# Altium PCB 电眼主板.PcbDoc (part 2 of 3)
Units mm, origin at the board's own origin, x right, y up, seen from the top; angles counter-clockwise.
Board outline 180 x 100 mm, 2 copper layers (Top Layer, Bottom Layer); 220 components, 270 nets, 826 pads, 211 vias.
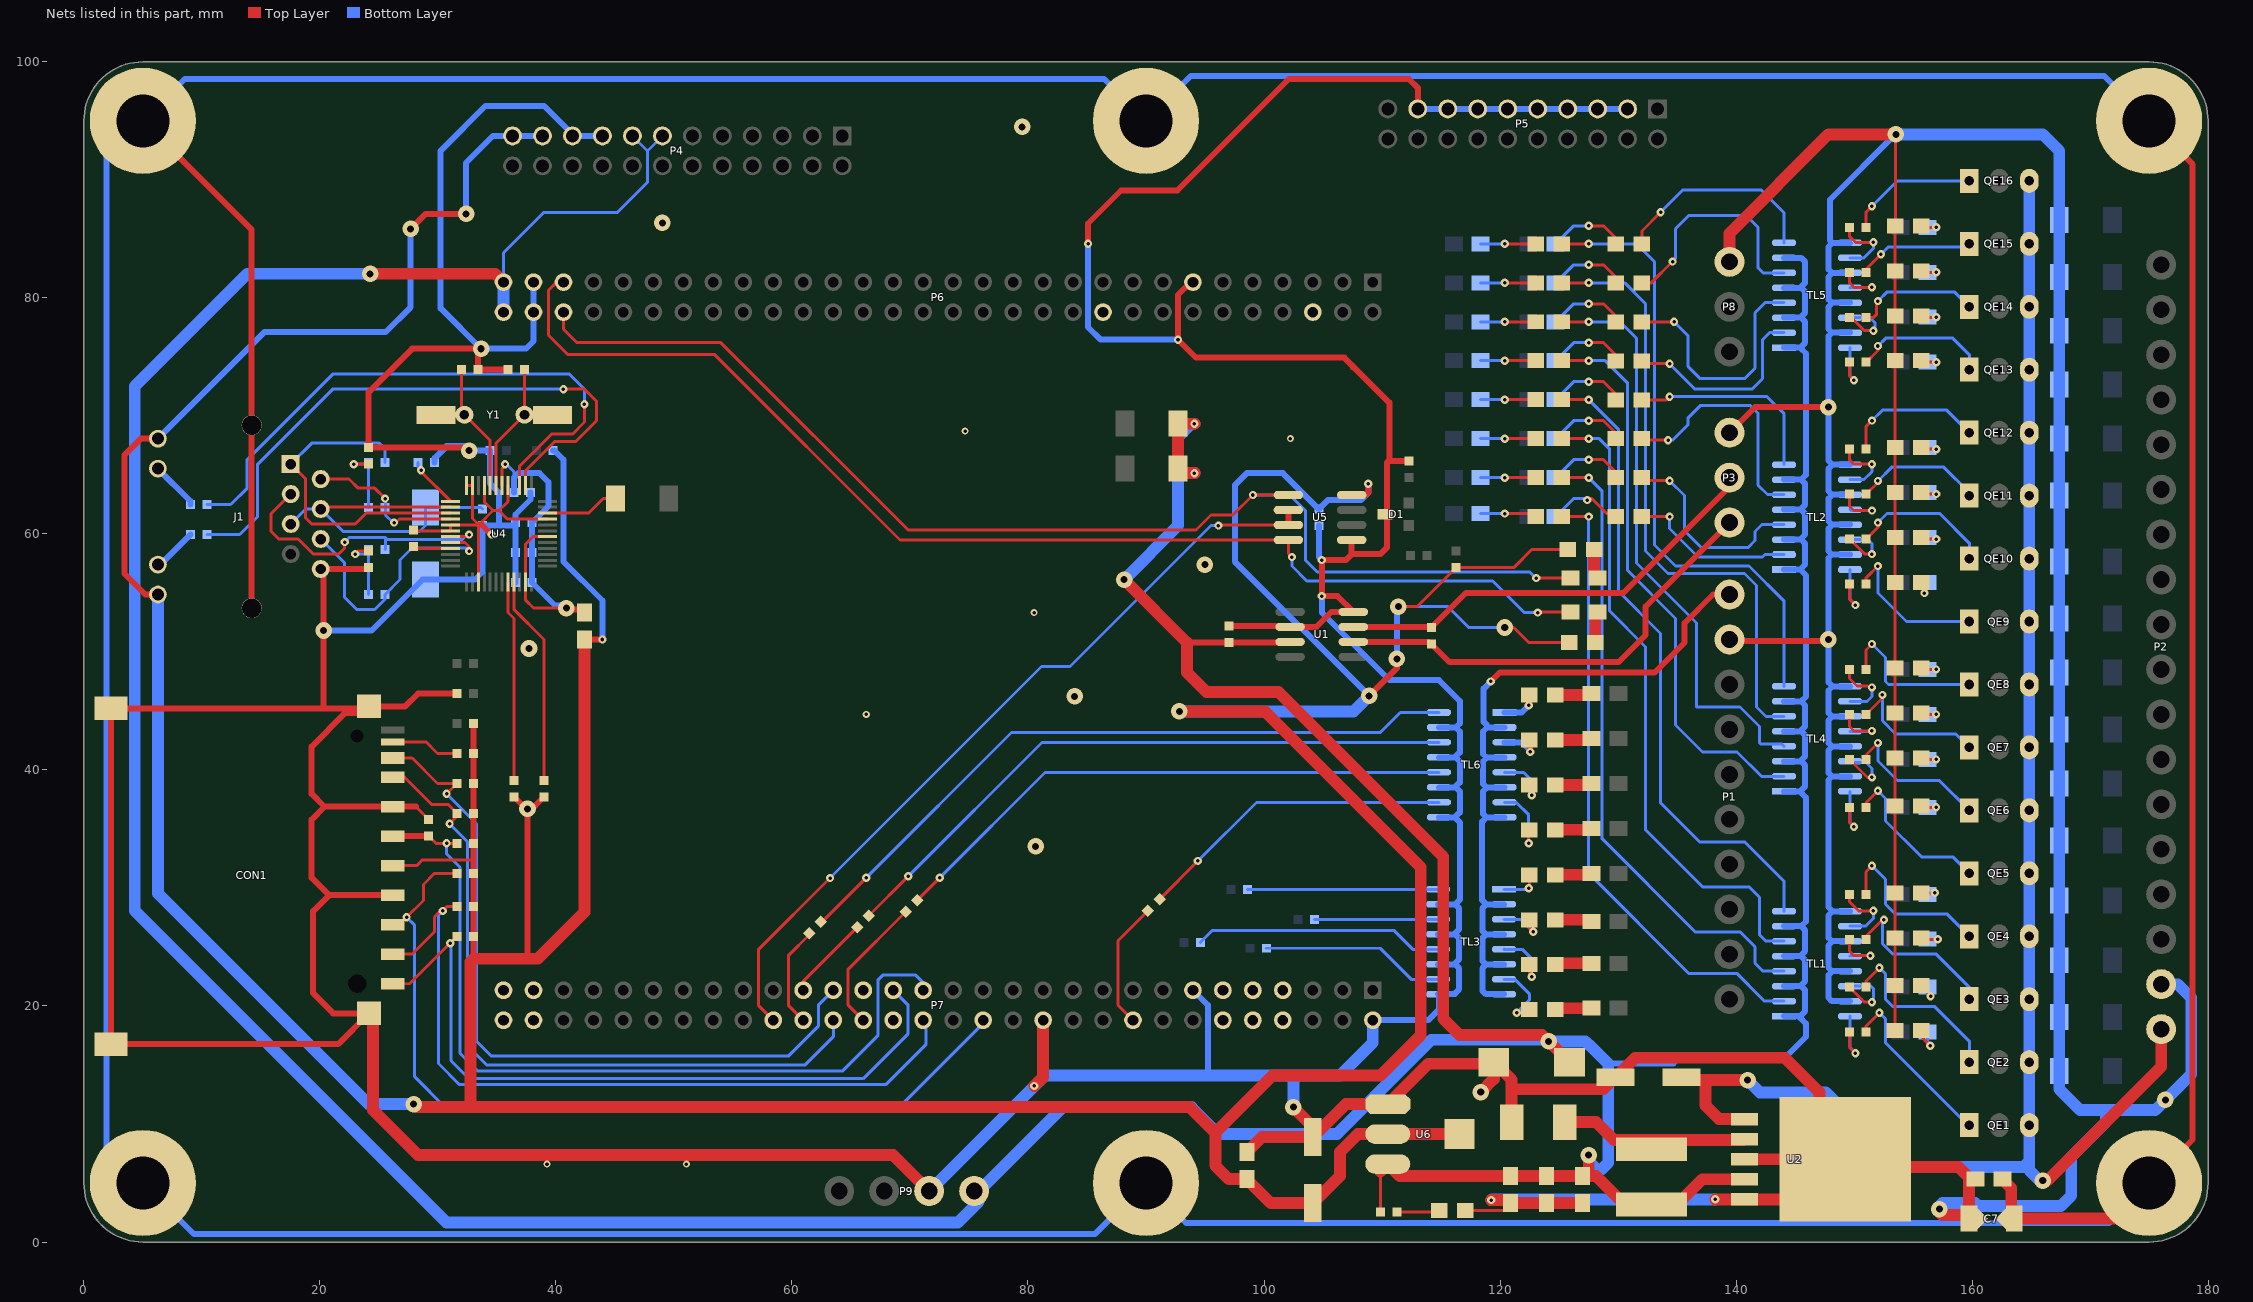
[diagram p2: the nets of this part, all layers, seen from the top]

## Via types
v1: diameter 0.7, hole 0.3, Top Layer to Bottom Layer, 166 vias
v2: diameter 1.4, hole 0.6, Top Layer to Bottom Layer, 39 vias
v3: diameter 0.6, hole 0.3, Top Layer to Bottom Layer, 6 vias

## Nets (pads, with @x,y where several pads share a name; then routed paths per layer and width w, separated by ;. In a path a pad name is that pad's centre, name@x,y a point inside that pad or via, vN(x,y) a via of type N, cw(c..) or ccw(c..) an arc to the next point about the centre after c; other vN are vias at no path point) (continued)
GND: C1.2 C2.1 C3.1 C4.1 C5.2 C6.2 C7.2 C8.2 C9.1 C10.1 C11.1 C12.2 C13.1 C14.1 C15.1 C16.1 C17.2 C18.2 C19.1 C20.1 CON1.3 CON1.6 CON1.12 CON1.13 CON1.14 CON1.15 CT1.2 CT2.2 D1.3 D2.2 DE1.1 DE2.1 DE3.1 DE4.1 DE5.1 DE6.1 DE7.1 DE8.1 DE9.1 DE10.1 DE11.1 DE12.1 DE13.1 DE14.1 DE15.1 DE16.1 J1.8 LED1.2 LED2.2 LED3.2 LED4.2 LED17.2 LED18.2 LED19.2 LED20.2 LED33.2 LED34.2 LED35.2 LED36.2 LED37.2 LED38.2 LED39.2 LED40.2 P1.9 P2.17 P3.3 P4.17 P4.19 P5.3 P5.5 P5.7 P5.9 P5.11 P5.13 P5.15 P5.17 P6.13 P6.57 P6.58 P7.2 P7.13 P7.24 P8.3 P9.3 R26.2 R33.2 R35.1 R38.2 R39.1 TL1.9 TL1.11 TL1.13 TL1.15 TL2.9 TL2.11 TL2.13 TL2.15 TL3.9 TL3.11 TL3.13 TL3.15 TL4.9 TL4.11 TL4.13 TL4.15 TL5.9 TL5.11 TL5.13 TL5.15 TL6.9 TL6.11 TL6.13 TL6.15 U1.2 U1.8 U2.3 U2.5 U2.6 U4.5 U4.6 U4.15 U4.33 U4.41 U4.45 U4.47 U4.48 U5.5 U6.1 V1.1 | length 1116.1
  Top Layer w0.254: C8.2@27.997,60.268 U4.6@31.083,60.268 U4.5@31.083,60.768 33.433,60.768 ; 28.14,36.884 C2.1@29.21,35.814 ; U4.48@32.433,64.118 U4.47@32.933,64.118 32.933,61.298 33.433,60.798 33.433,60.768 ; v2@32.433,66.85 v2(32.639,67.056) 32.766,66.929 v2@33.274,66.929 ; U4.15@33.433,55.918 33.433,60.768 ; U4.45@33.933,64.118 33.933,62.714 34.671,61.976 ; U4.41@35.933,64.118 35.933,62.73 35.179,61.976 ; U4.33@39.283,61.268 35.887,61.268 35.179,61.976 ; D2.2@117.043,2.667 120.269,2.667 C10.1@120.904,3.302 ; P8.3@139.446,83.058 P8.3@139.446,83.185 ; LED1.2@153.467,17.907 LED2.2@153.467,21.717 LED3.2@153.467,25.781 LED4.2@153.467,29.591 LED17.2@153.467,36.957 LED18.2@153.467,41.021 LED19.2@153.467,44.831 LED20.2@153.467,48.641 153.467,63.5 153.467,74.676 153.467,86.081 LED40.2@153.492,86.106 153.492,93.802 v2(153.543,93.853) ; 33.433,60.768 33.463,60.768 33.493,60.798 34.671,61.976 ; 34.671,61.976 35.179,61.976
  Top Layer w0.508: CON1.14@2.458,45.384 CON1.14@2.286,45.212 ; CON1.13@23.876,44.831 22.164,44.831 19.304,41.971 19.304,37.973 20.393,36.884 ; C20.1@24.13,57.15 24.008,57.028 J1.8@20.066,57.028 20.32,56.774 v2(20.32,51.816) 20.32,45.212 ; CON1.13@24.162,45.212 20.32,45.212 ; CON1.13@24.162,45.384 27.223,45.384 28.321,46.482 R26.2@31.623,46.482 ; CON1.3@26.162,29.384 20.781,29.384 ; 28.14,36.884 CON1.6@26.162,36.884 20.393,36.884 ; v2(32.639,67.056) 32.385,67.31 C19.1@24.13,67.31 24.13,72.009 27.813,75.692 v2(33.655,75.692) 33.401,75.438 C18.2@33.401,73.914 C17.2@35.941,73.914 ; 33.433,60.798 33.493,60.798 33.69,60.798 v1(34.544,59.944) ; v1(85.09,84.582) 85.09,86.306 87.884,89.1 92.656,89.1 102.108,98.552 112.268,98.552 113.03,97.79 P5.17@113.03,96.012 ; P6.13@93.98,81.336 93.782,81.336 92.71,80.264 v1(92.71,76.454) 94.234,74.93 106.807,74.93 107.521,74.216 ; C1.2@97.028,52.197 102.135,52.197 U1.2@102.211,52.121 104.445,52.121 105.715,53.391 U1.8@107.568,53.391 ; 105.537,57.785 v1(104.902,57.785) ; U5.5@107.428,59.487 107.428,58.293 ; 107.521,74.12 107.521,74.216 ; U1.8@108.128,53.391 U1.8@107.568,53.391 ; 110.405,64.571 110.405,65.405 ; R38.2@112.268,66.167 110.532,66.167 ; P1.9@139.446,50.292 140.081,50.927 147.701,50.927 v2(147.828,51.054) ; P3.3@139.446,68.58 141.605,70.739 v2(147.828,70.739) ; CON1.14@2.286,45.212 20.32,45.212 ; CON1.14@2.286,45.212 CON1.15@2.286,16.764 21.542,16.764 CON1.12@24.162,19.384 21.129,19.384 19.431,21.082 19.431,28.034 20.781,29.384 ; 20.393,36.884 19.304,35.795 19.304,30.861 20.781,29.384 ; v1(104.902,57.785) 106.934,57.785 107.428,58.279 107.428,58.293 ; v1(104.902,57.785) v1(104.902,54.737) 106.222,54.737 U1.8@107.568,53.391 ; 107.428,58.293 109.855,58.293 110.405,58.843 110.405,65.405 ; 107.521,74.216 110.617,71.12 110.617,66.252 110.532,66.167 ; 110.405,65.405 110.405,66.04 110.532,66.167
  Top Layer w1: CON1.12@24.162,19.384 24.511,19.035 24.511,11.176 28.321,7.366 68.58,7.366 P9.3@71.628,4.318 ; v1(80.535,13.225) 81.28,13.97 P7.24@81.28,18.796 ; C11.1@98.552,7.62 99.828,8.896 C12.2@104.14,8.896 ; v2(102.489,11.43) 104.14,9.779 C12.2@104.14,8.896 ; v2(118.364,12.7) 119.482,13.818 CT1.2@119.482,15.24 ; v1(119.253,3.556) 120.65,3.556 C10.1@120.904,3.302 C6.2@123.952,3.302 C4.1@127,3.302 ; V1.1@120.98,10.16 120.98,12.941 ; v1(138.234,3.614) U2.5@140.716,3.614 145.85,3.614 U2.6@149.25,7.014 ; P1.9@139.444,50.29 P1.9@139.446,50.292 ; P8.3@139.446,83.058 139.446,85.471 147.828,93.853 v2(153.543,93.853) ; U2.3@140.716,7.014 U2.6@149.25,7.014 ; U2.6@153.978,2.286 U2.6@149.25,7.014 ; v2(157.226,2.794) 157.226,2.54 157.48,2.286 159.436,2.286 C7.2@159.741,1.981 ; C7.2@160.35,1.981 C7.2@159.741,1.981 ; C12.2@104.14,8.896 106.927,11.683 U6.1@110.488,11.683 113.918,15.113 119.355,15.113 CT1.2@119.482,15.24 ; CT1.2@119.482,15.24 120.98,13.741 120.98,12.941 ; 120.98,12.941 128.759,12.941 C5.2@129.788,13.97 131.439,15.621 133.223,15.621 133.731,15.621 144.145,15.621 147.066,12.7 147.066,9.198 U2.6@149.25,7.014 ; U2.6@149.25,7.014 149.914,6.35 158.852,6.35 159.741,5.461 C7.2@159.741,1.981
  Bottom Layer w0.254: C14.1@36.322,60.706 C14.1@36.576,60.96 ; 104.648,58.039 v1(104.902,57.785)
  Bottom Layer w0.508: v2(20.32,51.816) 24.384,51.816 28.702,56.134 CT2.2@28.956,56.134 33.147,56.134 33.782,56.769 C9.1@33.782,60.706 ; R35.1@29.718,66.04 29.718,66.421 30.734,67.437 32.258,67.437 v2(32.639,67.056) R33.2@34.417,67.056 34.424,67.049 34.424,64.255 35.179,63.5 35.179,60.833 35.306,60.706 ; v1(34.544,59.944) C9.1@33.782,60.706 ; C14.1@36.322,60.706 35.306,60.706 ; C16.1@36.576,55.88 C13.1@36.576,58.42 C14.1@36.576,60.96 36.576,61.648 37.846,62.918 C15.1@37.846,63.5 ; P6.57@38.1,81.336 P6.58@38.1,78.796 38.1,76.327 37.465,75.692 v2(33.655,75.692) 30.226,79.121 30.226,92.456 30.407,92.637 34.036,96.266 38.989,96.266 41.402,93.853 P4.19@41.402,93.726 P4.17@43.942,93.726 ; v1(85.09,84.582) 85.09,77.526 86.162,76.454 v1(92.71,76.454) ; P7.13@93.98,21.336 95.25,20.066 95.25,14.097 ; 104.648,58.039 C3.1@104.648,60.706 ; v1(104.902,54.737) 104.902,53.34 110.617,47.625 114.808,47.625 116.586,45.847 116.586,43.939 116.248,43.601 ; P7.2@109.22,18.796 113.919,18.796 114.808,19.685 114.808,20.936 TL3.9@114.749,20.995 116.106,20.995 ; P5.17@113.03,96.012 P5.15@115.57,96.012 P5.13@118.11,96.012 P5.3@130.81,96.012 ; TL3.11@114.749,23.535 116.106,23.535 ; TL3.13@114.749,26.075 116.106,26.075 ; TL3.15@114.749,28.615 116.189,28.615 ; TL6.9@114.808,35.981 116.165,35.981 ; TL6.11@114.808,38.521 116.165,38.521 ; TL6.13@114.808,41.061 116.165,41.061 ; TL6.15@114.808,43.601 116.248,43.601 ; 116.189,20.995 116.106,20.995 ; 116.248,35.981 116.165,35.981 ; TL1.15@149.665,20.407 148.122,20.407 147.828,20.701 147.828,22.606 148.169,22.947 ; TL1.13@149.665,22.947 148.169,22.947 ; TL1.11@149.665,25.487 148.169,25.487 ; TL1.9@149.665,28.027 148.169,28.027 ; TL4.15@149.665,39.457 148.122,39.457 ; TL4.13@149.665,41.997 148.169,41.997 ; TL4.11@149.665,44.537 148.169,44.537 ; TL4.9@149.665,47.077 148.169,47.077 ; TL2.15@149.665,58.253 148.122,58.253 ; TL2.13@149.665,60.793 148.169,60.793 ; TL2.11@149.665,63.333 148.169,63.333 ; TL2.9@149.665,65.873 148.169,65.873 ; TL5.15@149.665,77.049 148.122,77.049 ; TL5.13@149.665,79.589 148.169,79.589 ; TL5.11@149.665,82.129 148.169,82.129 ; TL5.9@149.665,84.669 148.169,84.669 ; v2@153.492,93.853 147.955,88.316 147.955,84.883 148.169,84.669 ; C9.1@33.782,60.706 35.306,60.706 ; 116.106,20.995 116.53,21.419 116.53,23.194 116.189,23.535 116.106,23.535 ; 116.106,23.535 116.53,23.959 116.53,25.734 116.189,26.075 116.106,26.075 ; 116.106,26.075 116.53,26.499 116.53,28.274 116.189,28.615 ; 116.165,35.981 116.589,36.405 116.589,38.18 116.248,38.521 116.165,38.521 ; 116.165,35.981 116.586,35.56 116.586,29.012 116.189,28.615 ; 116.165,38.521 116.589,38.945 116.589,40.72 116.248,41.061 116.165,41.061 ; 116.165,41.061 116.589,41.485 116.589,43.26 116.248,43.601 ; 148.122,39.457 147.828,39.751 147.828,41.656 148.169,41.997 ; 148.122,39.457 147.828,39.163 147.828,28.368 148.169,28.027 ; 148.122,58.253 147.828,58.547 147.828,60.452 148.169,60.793 ; 148.122,58.253 147.828,57.959 v2(147.828,51.054) 147.828,47.418 148.169,47.077 ; 148.122,77.049 147.828,77.343 147.828,79.248 148.169,79.589 ; 148.122,77.049 147.828,76.755 v2(147.828,70.739) 147.828,66.214 148.169,65.873 ; 148.169,22.947 148.122,22.947 147.828,23.241 147.828,25.146 148.169,25.487 ; 148.169,25.487 148.122,25.487 147.828,25.781 147.828,27.686 148.169,28.027 ; 148.169,41.997 148.122,41.997 147.828,42.291 147.828,44.196 148.169,44.537 ; 148.169,44.537 148.122,44.537 147.828,44.831 147.828,46.736 148.169,47.077 ; 148.169,60.793 148.122,60.793 147.828,61.087 147.828,62.992 148.169,63.333 ; 148.169,63.333 148.122,63.333 147.828,63.627 147.828,65.532 148.169,65.873 ; 148.169,79.589 148.122,79.589 147.828,79.883 147.828,81.788 148.169,82.129 ; 148.169,82.129 148.122,82.129 147.828,82.423 147.828,84.328 148.169,84.669
  Bottom Layer w1: P9.3@71.628,4.318 81.407,14.097 95.25,14.097 102.489,14.097 ; v2(102.489,11.43) 102.489,14.097 ; P7.2@109.22,18.796 109.22,16.891 106.426,14.097 102.489,14.097 ; v1(119.253,3.556) 119.311,3.614 130.556,3.614 v1(138.234,3.614) ; v2@153.492,93.853 v2(153.543,93.853) 165.989,93.853 167.386,92.456 DE16.1@167.386,86.614 DE15.1@167.386,81.788 DE14.1@167.386,77.216 DE13.1@167.386,72.644 DE12.1@167.386,68.072 DE11.1@167.386,63.246 DE10.1@167.386,57.658 DE9.1@167.386,52.832 DE8.1@167.386,48.26 DE7.1@167.386,43.434 DE6.1@167.386,38.862 DE5.1@167.386,34.036 DE4.1@167.386,28.956 DE3.1@167.386,23.876 DE2.1@167.386,19.05 DE1.1@167.386,14.478 167.386,12.954 169.164,11.176 171.323,11.176 ; v2(157.226,2.794) 157.226,3.048 157.48,3.302 160.274,3.302 160.528,3.048 167.513,3.048 168.402,3.937 168.402,7.239 171.323,10.16 171.323,11.176 ; P2.17@176.022,21.844 177.419,21.844 178.562,20.701 178.562,14.224 175.514,11.176 171.323,11.176
  other v2: 176.382,12.044 80.645,33.528 83.947,46.228 37.719,50.292 94.996,57.404 49.022,86.36 79.502,94.488
  other v3: 39.243,6.604 51.054,6.604 66.294,44.704 80.518,53.34 102.235,68.072 74.676,68.707
I2C1_SCL: P7.10
I2C1_SDA: P7.9
INPUT0: R46.2 TL6.16 | length 59.7
  Top Layer w0.254: R46.2@62.519,27.086 v1(66.294,30.861)
  Bottom Layer w0.254: v1(66.294,30.861) 78.613,43.18 109.855,43.18 111.546,44.871 TL6.16@114.808,44.871
INPUT1: R47.2 TL6.14 | length 54.4
  Top Layer w0.254: R47.2@66.52,27.658 v1(69.85,30.988)
  Bottom Layer w0.254: v1(69.85,30.988) 81.193,42.331 TL6.14@114.808,42.331
INPUT2: R48.2 TL6.12 | length 48.6
  Top Layer w0.254: R48.2@70.612,28.956 72.39,30.734 v1@72.39,30.861
  Bottom Layer w0.254: v1(72.517,30.861) 81.447,39.791 TL6.12@114.808,39.791
INPUT3: R49.2 TL6.10 | length 27
  Top Layer w0.254: R49.2@91.156,29.053 v1(94.392,32.289)
  Bottom Layer w0.254: v1(94.392,32.289) 99.354,37.251 TL6.10@114.808,37.251
INPUT4: R50.2 TL3.16 | length 16.2
  Bottom Layer w0.254: R50.2@98.592,29.885 TL3.16@114.749,29.885
INPUT5: R51.2 TL3.14 | length 10.5
  Bottom Layer w0.254: R51.2@104.267,27.345 TL3.14@114.749,27.345
INPUT6: R52.2 TL3.12 | length 21.2
  Bottom Layer w0.254: R52.2@94.615,25.4 95.631,26.416 110.998,26.416 112.609,24.805 TL3.12@114.749,24.805
INPUT7: R53.2 TL3.10 | length 15.7
  Bottom Layer w0.254: R53.2@100.203,24.892 109.855,24.892 112.522,22.225 114.709,22.225 TL3.10@114.749,22.265
LED0: P7.8
LED1: P7.7
LED2: P7.11
LEDA: J1.10 R41.2 | length 4.2
  Bottom Layer w0.508: J1.10@6.276,65.532 9.017,62.791 R41.2@9.017,62.484
LEDB: J1.11 R40.2 | length 3.8
  Bottom Layer w0.508: J1.11@6.276,57.404 6.477,57.404 R40.2@9.017,59.944
N24V1: P1.10 TL3.2 TL3.4 TL3.6 TL3.8 TL6.2 TL6.4 TL6.6 TL6.8 | length 65.2
  Top Layer w0.508: v1(119.22,47.498) 119.982,48.26 133.096,48.26 135.636,50.8 135.636,52.451 138.049,54.864 P1.10@139.446,54.864
  Bottom Layer w0.508: v1(119.22,47.498) 118.618,46.896 118.618,44.069 118.9,43.787 118.9,43.601 ; TL3.8@120.337,20.995 118.794,20.995 118.5,21.289 118.5,23.194 118.841,23.535 ; TL3.6@120.337,23.535 118.841,23.535 ; TL3.4@120.337,26.075 118.841,26.075 ; TL3.2@120.337,28.615 118.841,28.615 ; TL6.8@120.396,35.981 118.853,35.981 ; TL6.6@120.396,38.521 118.9,38.521 ; TL6.4@120.396,41.061 118.9,41.061 ; TL6.2@120.396,43.601 118.9,43.601 ; 118.841,23.535 118.794,23.535 118.5,23.829 118.5,25.734 118.841,26.075 ; 118.841,26.075 118.794,26.075 118.5,26.369 118.5,28.274 118.841,28.615 ; 118.841,28.615 118.491,28.965 118.491,35.619 118.853,35.981 ; 118.853,35.981 118.559,36.275 118.559,38.18 118.9,38.521 ; 118.9,38.521 118.853,38.521 118.559,38.815 118.559,40.72 118.9,41.061 ; 118.9,41.061 118.853,41.061 118.559,41.355 118.559,43.26 118.9,43.601
NCD_SD: CON1.11 R25.2 | length 5.9
  Top Layer w0.254: CON1.11@26.162,42.384 28.99,42.384 29.972,41.402 R25.2@31.623,41.402
NetC8_1: C8.1 U4.9 | length 3.2
  Top Layer w0.254: C8.1@27.94,58.928 28.1,58.768 U4.9@31.083,58.768
NetC13_2: C13.2 C14.2 C15.2 C16.2 FB1.1 U4.23 U4.30 U4.42 | length 33.4
  Top Layer w0.254: U4.42@35.433,64.118 35.433,65.532 35.687,65.786 v1(35.687,65.913) ; U4.30@39.283,59.768 38.051,59.768 37.433,59.15 U4.23@37.433,55.918 37.433,54.388 38.1,53.721 v2(40.894,53.721)
  Top Layer w0.508: v2@40.894,53.595 FB1.1@42.671,53.595
  Bottom Layer w0.254: v1(35.687,65.913) 35.814,65.913 36.449,65.278 36.449,64.77
  Bottom Layer w0.508: C15.2@36.449,63.5 36.449,64.77 36.83,65.151 38.608,65.151 39.37,64.389 39.37,62.357 C14.2@37.973,60.96 C16.2@37.973,55.88 39.921,53.932 40.683,53.932 v2(40.894,53.721)
NetC17_1: C17.1 U4.43 Y1.1 | length 10.8
  Top Layer w0.254: U4.43@34.933,64.118 34.933,67.699 Y1.1@37.338,70.104 C17.1@37.338,73.914
NetC18_1: C18.1 U4.44 Y1.2 | length 10.8
  Top Layer w0.254: C18.1@32.004,73.914 32.004,70.336 Y1.2@32.247,70.093 34.433,67.907 U4.44@34.433,64.118
NetC19_2: C19.2 R42.1 R43.1 | length 6.4
  Top Layer w0.254: v1(22.86,65.913) C19.2@24.13,65.913
  Bottom Layer w0.254: v1(22.86,65.913) 24.003,65.913 R42.1@24.13,66.04 R43.1@24.13,62.23
NetC20_2: C20.2 R44.1 R45.1 | length 6.4
  Top Layer w0.254: v1(22.987,58.293) 23.241,58.547 C20.2@24.13,58.547
  Bottom Layer w0.254: v1(22.987,58.293) 23.749,58.293 R44.1@24.13,58.674 R45.1@24.13,54.864
NetD2_1: D2.1 R29.1 | length 3.6
  Top Layer w0.254: R29.1@111.252,2.54 D2.1@114.706,2.54
  Top Layer w0.508: D2.1@114.706,2.54 D2.1@114.833,2.667
NetD3_2: D3.2 U4.34 | length 6.3
  Top Layer w0.254: U4.34@39.283,61.768 42.79,61.768 44.014,62.992 D3.2@45.058,62.992
NetL1_1: L1.1 U2.2 V1.2 | length 16.1
  Top Layer w1: V1.2@125.476,10.16 128.143,10.16 129.667,8.636 L1.1@132.969,8.636 ; L1.1@132.842,8.509 L1.1@132.969,8.636 ; U2.2@140.716,8.714 140.638,8.636 L1.1@132.969,8.636
NetLED1_1: LED1.1 RE1.2 | length 3
  Top Layer w0.254: LED1.1@155.677,17.907 155.448,17.678 155.448,17.653 v1(156.464,16.637)
  Bottom Layer w0.254: RE1.2@156.21,17.782 156.208,17.78 156.208,16.893 v1(156.464,16.637)
NetLED2_1: LED2.1 RE2.2 | length 2.8
  Top Layer w0.254: LED2.1@155.677,21.717 156.477,20.917 v1(156.477,20.828)
  Bottom Layer w0.254: RE2.2@156.21,21.59 155.715,21.59 v1(156.477,20.828)
NetLED3_1: LED3.1 RE3.2 | length 2.4
  Top Layer w0.254: LED3.1@155.677,25.781 155.804,25.654 v1(157.099,25.654)
  Bottom Layer w0.254: RE3.2@156.21,25.654 v1(157.099,25.654)
NetLED4_1: LED4.1 RE4.2 | length 1.8
  Top Layer w0.254: LED4.1@155.677,29.591 v1(156.845,29.591)
  Bottom Layer w0.254: RE4.2@156.21,29.591 v1(156.845,29.591)
NetLED5_1: LED5.1 TL1.2 | length 53.6
  Top Layer w0.254: LED5.1@125.222,61.468 v1(127.508,61.468)
  Bottom Layer w0.254: v1(127.508,61.468) 127.508,31.242 136.017,22.733 140.094,22.733 141.072,21.755 141.072,21.742 142.407,20.407 TL1.2@144.077,20.407
NetLED5_2: LED5.2 RH1.1 | length 4.6
  Top Layer w0.254: v1(120.396,61.722) LED5.2@123.012,61.722
  Bottom Layer w0.254: RH1.1@118.364,61.72 v1@120.394,61.72
NetLED6_1: LED6.1 TL2.2 | length 14.2
  Top Layer w0.254: LED6.1@132.021,61.462 134.36,61.462 v1(134.366,61.468)
  Bottom Layer w0.254: v1(134.366,61.468) 134.366,60.452 136.779,58.039 142.24,58.039 142.454,58.253 TL2.2@144.077,58.253
NetLED6_2: LED6.2 RH2.1 | length 6.5
  Top Layer w0.254: v1(127.381,62.865) 127.508,62.992 127.762,62.992 129.032,61.722 129.551,61.722 LED6.2@129.811,61.462
  Bottom Layer w0.254: RH2.1@124.714,61.466 126.24,62.992 127.254,62.992 v1(127.381,62.865)
NetLED7_1: LED7.1 RH3.1 | length 3.1
  Top Layer w1: LED7.1@124.689,19.685 124.814,19.81 RH3.1@127.762,19.81
NetLED7_2: LED7.2 TL3.7 | length 6
  Top Layer w0.254: v1(121.412,19.431) 122.377,19.431 122.479,19.533 LED7.2@122.479,19.685
  Bottom Layer w0.254: TL3.7@120.337,22.265 121.245,22.265 122.479,21.031 122.479,20.498 v1(121.412,19.431)
NetLED8_1: LED8.1 TL1.4 | length 54.3
  Top Layer w0.254: LED8.1@125.222,64.77 v1(127.508,64.77)
  Bottom Layer w0.254: v1(127.508,64.77) 128.651,63.627 128.651,34.163 136.525,26.289 140.335,26.289 141.605,25.019 141.605,23.622 142.28,22.947 TL1.4@144.077,22.947
NetLED8_2: LED8.2 RH4.1 | length 4.6
  Top Layer w0.254: v1(120.396,64.77) LED8.2@123.012,64.77
  Bottom Layer w0.254: RH4.1@118.364,64.768 v1@120.394,64.768
NetLED9_1: LED9.1 TL2.4 | length 17.5
  Top Layer w0.254: LED9.1@132.021,64.764 132.269,64.516 v1(134.366,64.516)
  Bottom Layer w0.254: v1(134.366,64.516) 135.636,63.246 135.636,60.274 137.071,58.839 141.008,58.839 141.605,59.436 141.605,60.198 142.2,60.793 TL2.4@144.077,60.793
NetLED9_2: LED9.2 RH5.1 | length 6.7
  Top Layer w0.254: v1(127.508,66.294) 128.772,66.294 129.811,65.255 LED9.2@129.811,64.764
  Bottom Layer w0.254: RH5.1@124.714,64.767 126.24,66.294 v1(127.508,66.294)
NetLED10_1: LED10.1 RH6.1 | length 3.1
  Top Layer w1: LED10.1@124.689,23.495 124.814,23.62 RH6.1@127.762,23.62
NetLED10_2: LED10.2 TL3.5 | length 5.4
  Top Layer w0.254: LED10.2@122.479,23.495 122.479,22.682 v1(122.682,22.479)
  Bottom Layer w0.254: TL3.5@120.377,24.845 TL3.5@120.337,24.805 121.88,24.805 122.682,24.003 v1(122.682,22.479)
NetLED11_1: LED11.1 TL1.6 | length 55.5
  Top Layer w0.254: LED11.1@125.222,68.072 v1(127.508,68.072)
  Bottom Layer w0.254: v1(127.508,68.072) 128.397,68.072 129.286,67.183 129.286,53.474 132.334,50.426 132.334,34.925 137.16,30.099 141.097,30.099 141.986,29.21 141.986,26.035 142.534,25.487 TL1.6@144.077,25.487
NetLED11_2: LED11.2 RH7.1 | length 4.6
  Top Layer w0.254: v1(120.396,68.072) LED11.2@123.012,68.072
  Bottom Layer w0.254: RH7.1@118.364,68.07 v1@120.394,68.07
NetLED12_1: LED12.1 TL2.6 | length 20.3
  Top Layer w0.254: LED12.1@132.021,68.066 132.142,67.945 v1(134.239,67.945)
  Bottom Layer w0.254: v1(134.239,67.945) 134.62,67.945 135.946,69.271 135.946,69.85 136.962,70.866 141.224,70.866 141.859,70.231 141.859,64.135 142.661,63.333 TL2.6@144.077,63.333
NetLED12_2: LED12.2 RH8.1 | length 6.7
  Top Layer w0.254: v1(127.508,69.596) 128.772,69.596 129.811,68.557 LED12.2@129.811,68.066
  Bottom Layer w0.254: RH8.1@124.714,68.07 126.24,69.596 v1(127.508,69.596)
NetLED13_1: LED13.1 RH9.1 | length 3.1
  Top Layer w1: LED13.1@124.689,27.305 127.633,27.305 RH9.1@127.762,27.176
NetLED13_2: LED13.2 TL3.3 | length 4.1
  Top Layer w0.254: LED13.2@122.479,27.305 122.479,26.619 v1(122.809,26.289)
  Bottom Layer w0.254: TL3.3@120.337,27.345 121.753,27.345 v1(122.809,26.289)
NetLED14_1: LED14.1 TL1.8 | length 54.7
  Top Layer w0.254: LED14.1@125.222,71.374 v1(127.508,71.374)
  Bottom Layer w0.254: v1(127.508,71.374) 130.048,68.834 130.048,55.118 133.604,51.562 133.604,37.211 136.906,33.909 140.716,33.909 144.077,30.548 TL1.8@144.077,28.027
NetLED14_2: LED14.2 RH10.1 | length 4.6
  Top Layer w0.254: v1(120.396,71.374) LED14.2@123.012,71.374
  Bottom Layer w0.254: RH10.1@118.364,71.372 v1@120.394,71.372
NetLED15_1: LED15.1 TL2.8 | length 17.1
  Top Layer w0.254: LED15.1@132.021,71.368 134.106,71.368 v1(134.366,71.628)
  Bottom Layer w0.254: v1(134.366,71.628) 142.621,71.628 144.077,70.172 TL2.8@144.077,65.873
NetLED15_2: LED15.2 RH11.1 | length 6.7
  Top Layer w0.254: v1(127.508,72.898) 128.772,72.898 129.811,71.859 LED15.2@129.811,71.368
  Bottom Layer w0.254: RH11.1@124.714,71.372 126.24,72.898 v1(127.508,72.898)
NetLED16_1: LED16.1 RH12.1 | length 3.1
  Top Layer w1: LED16.1@124.689,31.115 127.637,31.115 RH12.1@127.762,31.239
NetLED16_2: LED16.2 TL3.1 | length 3.3
  Top Layer w0.254: v1(122.428,29.972) 122.479,30.023 LED16.2@122.479,31.115
  Bottom Layer w0.254: TL3.1@120.337,29.885 122.341,29.885 v1(122.428,29.972)
NetLED17_1: LED17.1 RE5.2 | length 2.1
  Top Layer w0.254: LED17.1@155.677,36.957 155.804,36.83 v1(156.947,36.83)
  Bottom Layer w0.254: RE5.2@156.21,36.83 v1(156.947,36.83)
NetLED18_1: LED18.1 RE6.2 | length 2.1
  Top Layer w0.254: LED18.1@155.677,41.021 155.804,40.894 v1(156.947,40.894)
  Bottom Layer w0.254: RE6.2@156.21,40.894 v1(156.947,40.894)
NetLED19_1: LED19.1 RE7.2 | length 2.1
  Top Layer w0.254: LED19.1@155.677,44.831 155.804,44.704 v1(156.947,44.704)
  Bottom Layer w0.254: RE7.2@156.21,44.704 v1(156.947,44.704)
NetLED20_1: LED20.1 RE8.2 | length 2.1
  Top Layer w0.254: LED20.1@155.677,48.641 155.804,48.514 v1(156.947,48.514)
  Bottom Layer w0.254: RE8.2@156.21,48.514 v1(156.947,48.514)
NetLED21_1: LED21.1 RH13.1 | length 3.1
  Top Layer w1: LED21.1@124.689,34.925 127.637,34.925 RH13.1@127.762,35.05
NetLED21_2: LED21.2 TL6.7 | length 6
  Top Layer w0.254: v1(122.428,33.782) 122.428,34.874 LED21.2@122.479,34.925
  Bottom Layer w0.254: TL6.7@120.396,37.251 121.372,37.251 122.428,36.195 v1(122.428,33.782)
NetLED22_1: LED22.1 TL4.2 | length 48
  Top Layer w0.254: LED22.1@125.222,74.676 v1(127.508,74.676)
  Bottom Layer w0.254: v1(127.508,74.676) 128.905,74.676 130.81,72.771 130.81,56.896 134.874,52.832 134.874,43.815 137.16,41.529 140.081,41.529 142.153,39.457 TL4.2@144.077,39.457
NetLED22_2: LED22.2 RH14.1 | length 4.6
  Top Layer w0.254: v1(120.396,74.676) LED22.2@123.012,74.676
  Bottom Layer w0.254: RH14.1@118.364,74.674 v1@120.394,74.674
NetLED23_1: LED23.1 TL5.2 | length 17
  Top Layer w0.254: LED23.1@132.021,74.67 132.269,74.422 v1(134.366,74.422)
  Bottom Layer w0.254: v1(134.366,74.422) 136.525,72.263 141.351,72.263 142.24,73.152 142.24,76.454 142.835,77.049 TL5.2@144.077,77.049
NetLED23_2: LED23.2 RH15.1 | length 6.7
  Top Layer w0.254: v1(127.508,76.2) 128.772,76.2 129.811,75.161 LED23.2@129.811,74.67
  Bottom Layer w0.254: RH15.1@124.714,74.674 126.24,76.2 v1(127.508,76.2)
NetLED24_1: LED24.1 RH16.1 | length 3.1
  Top Layer w1: LED24.1@124.689,38.735 127.637,38.735 RH16.1@127.762,38.86
NetLED24_2: LED24.2 TL6.5 | length 4.9
  Top Layer w0.254: LED24.2@122.479,38.735 122.555,38.659 122.555,37.973 v1(122.682,37.846)
  Bottom Layer w0.254: TL6.5@120.436,39.831 TL6.5@120.396,39.791 122.007,39.791 122.479,39.319 122.479,37.998 122.631,37.846 v1(122.682,37.846)
NetLED25_1: LED25.1 TL4.4 | length 49.9
  Top Layer w0.254: LED25.1@125.222,77.978 v1(127.508,77.978)
  Bottom Layer w0.254: v1(127.508,77.978) 130.169,77.978 131.572,76.575 131.572,57.531 136.652,52.451 136.652,45.339 140.335,45.339 141.986,43.688 141.986,42.291 142.075,42.202 143.872,42.202 TL4.4@144.077,41.997
NetLED25_2: LED25.2 RH17.1 | length 4.6
  Top Layer w0.254: v1(120.396,77.978) LED25.2@123.012,77.978
  Bottom Layer w0.254: RH17.1@118.364,77.976 v1@120.394,77.976
NetLED26_1: LED26.1 TL5.4 | length 21
  Top Layer w0.254: LED26.1@132.021,77.972 134.741,77.972 v1(134.747,77.978)
  Bottom Layer w0.254: v1(134.747,77.978) 135.946,76.779 135.946,74.168 136.962,73.152 140.716,73.152 141.605,74.041 141.605,78.74 142.454,79.589 TL5.4@144.077,79.589
NetLED26_2: LED26.2 RH18.1 | length 6.7
  Top Layer w0.254: v1(127.508,79.502) 128.772,79.502 129.811,78.463 LED26.2@129.811,77.972
  Bottom Layer w0.254: RH18.1@124.714,77.976 126.24,79.502 v1(127.508,79.502)
NetLED27_1: LED27.1 RH19.1 | length 3.1
  Top Layer w1: LED27.1@124.689,42.545 127.637,42.545 RH19.1@127.762,42.67
NetLED27_2: LED27.2 TL6.3 | length 3.6
  Top Layer w0.508: LED27.2@122.479,42.545 122.555,42.469 v1(122.555,41.529)
  Bottom Layer w0.508: TL6.3@120.396,42.331 121.88,42.331 122.555,41.656 v1(122.555,41.529)
NetLED28_1: LED28.1 TL4.6 | length 52.4
  Top Layer w0.254: LED28.1@125.222,81.28 v1(127.508,81.28)
  Bottom Layer w0.254: v1(127.508,81.28) 130.556,81.28 132.334,79.502 132.334,58.547 134.239,56.642 140.716,56.642 141.732,55.626 141.732,45.339 142.534,44.537 TL4.6@144.077,44.537
NetLED28_2: LED28.2 RH20.1 | length 4.6
  Top Layer w0.254: v1(120.396,81.28) LED28.2@123.012,81.28
  Bottom Layer w0.254: RH20.1@118.364,81.278 v1@120.394,81.278
NetLED29_1: LED29.1 TL5.6 | length 19.9
  Top Layer w0.254: LED29.1@132.021,81.274 132.82,81.274 v1(134.62,83.074)
  Bottom Layer w0.254: v1(134.62,83.074) 134.874,83.328 134.874,85.852 136.017,86.995 140.843,86.995 141.859,85.979 141.859,82.55 142.28,82.129 TL5.6@144.077,82.129
NetLED29_2: LED29.2 RH21.1 | length 6.7
  Top Layer w0.254: v1(127.508,82.804) 128.772,82.804 129.811,81.765 LED29.2@129.811,81.274
  Bottom Layer w0.254: RH21.1@124.714,81.278 126.24,82.804 v1(127.508,82.804)
NetLED30_1: LED30.1 RH22.1 | length 3.1
  Top Layer w1: LED30.1@124.689,46.355 127.637,46.355 RH22.1@127.762,46.48
NetLED30_2: LED30.2 TL6.1 | length 3.2
  Top Layer w0.508: v1(122.428,45.466) 122.479,45.517 LED30.2@122.479,46.355
  Bottom Layer w0.508: TL6.1@120.396,44.871 121.833,44.871 v1(122.428,45.466)
NetLED31_1: LED31.1 TL4.8 | length 52.7
  Top Layer w0.254: LED31.1@125.222,84.582 v1(127.508,84.582)
  Bottom Layer w0.254: v1(127.508,84.582) 131.572,84.582 133.096,83.058 133.096,59.055 134.874,57.277 141.097,57.277 144.077,54.297 TL4.8@144.077,47.077
NetLED31_2: LED31.2 RH23.1 | length 4.6
  Top Layer w0.254: v1(120.396,84.582) LED31.2@123.012,84.582
  Bottom Layer w0.254: RH23.1@118.364,84.58 120.394,84.58 v1(120.396,84.582)
NetLED32_1: LED32.1 TL5.8 | length 17.9
  Top Layer w0.254: LED32.1@132.021,84.576 132.021,85.666 v1(133.604,87.249)
  Bottom Layer w0.254: v1(133.604,87.249) 135.509,89.154 142.113,89.154 144.077,87.19 TL5.8@144.077,84.669
NetLED32_2: LED32.2 RH24.1 | length 6.7
  Top Layer w0.254: v1(127.508,86.106) 128.772,86.106 129.811,85.067 LED32.2@129.811,84.576
  Bottom Layer w0.254: RH24.1@124.714,84.58 126.24,86.106 v1(127.508,86.106)
NetLED33_1: LED33.1 RE9.2 | length 1.6
  Top Layer w0.254: LED33.1@155.702,55.88 155.956,55.626 v1(155.956,54.991)
  Bottom Layer w0.254: v1(155.956,54.991) 155.956,55.245 RE9.2@155.956,55.626
NetLED34_1: LED34.1 RE10.2 | length 2.9
  Top Layer w0.254: LED34.1@155.702,59.69 155.829,59.563 v1(156.972,59.563)
  Bottom Layer w0.254: 155.346,59.563 v1(156.972,59.563)
NetLED35_1: LED35.1 RE11.2 | length 2.1
  Top Layer w0.254: LED35.1@155.702,63.5 155.829,63.373 v1(156.972,63.373)
  Bottom Layer w0.254: RE11.2@156.21,63.373 v1(156.972,63.373)
NetLED36_1: LED36.1 RE12.2 | length 2.1
  Top Layer w0.254: LED36.1@155.702,67.31 155.829,67.183 v1(156.972,67.183)
  Bottom Layer w0.254: RE12.2@156.21,67.183 v1(156.972,67.183)
NetLED37_1: LED37.1 RE13.2 | length 2.1
  Top Layer w0.254: LED37.1@155.702,74.676 155.829,74.549 v1(156.972,74.549)
  Bottom Layer w0.254: RE13.2@156.235,74.549 v1(156.972,74.549)
NetLED38_1: LED38.1 RE14.2 | length 2.1
  Top Layer w0.254: LED38.1@155.702,78.486 155.829,78.359 v1(156.972,78.359)
  Bottom Layer w0.254: RE14.2@156.235,78.359 v1(156.972,78.359)
NetLED39_1: LED39.1 RE15.2 | length 2.1
  Top Layer w0.254: LED39.1@155.702,82.296 155.829,82.169 v1(156.972,82.169)
  Bottom Layer w0.254: RE15.2@156.235,82.169 v1(156.972,82.169)
NetLED40_1: LED40.1 RE16.2 | length 2.1
  Top Layer w0.254: LED40.1@155.702,86.106 155.829,85.979 v1(156.972,85.979)
  Bottom Layer w0.254: RE16.2@156.235,85.979 v1(156.972,85.979)
NetLED41_2: LED41.2 R31.2 | length 1.9
  Top Layer w1: LED41.2@128.067,50.8 128.067,52.675
NetLED42_2: LED42.2 R32.2 | length 1.8
  Top Layer w1: R32.2@127.965,56.845 LED42.2@127.965,58.674
NetP3_1: P3.1 R17.2 U1.6 | length 38.9
  Top Layer w0.508: U1.6@107.568,50.851 114.008,50.851 R17.2@114.186,50.673 115.71,49.149 130.048,49.149 132.334,51.435 132.334,53.848 P3.1@139.446,60.96
NetP3_2: P3.2 R17.1 U1.7 | length 37.6
  Top Layer w0.254: R17.1@114.135,52.121 R17.1@114.186,52.07
  Top Layer w0.508: U1.7@107.568,52.121 R17.1@114.135,52.121 ; R17.1@114.186,52.07 117.107,54.991 130.429,54.991 139.446,64.008 P3.2@139.446,64.77
NetQE1_1: QE1.1 R1.2 | length 14.9
  Top Layer w0.254: R1.2@151.003,17.78 151.003,18.288 v1(152.146,19.431)
  Bottom Layer w0.254: v1(152.146,19.431) 152.667,18.91 152.667,16.878 159.639,9.906 QE1.1@159.766,9.906
NetQE2_1: QE2.1 R2.2 | length 15.4
  Top Layer w0.254: R2.2@151.003,21.59 151.003,22.098 v1(152.146,23.241)
  Bottom Layer w0.254: v1(152.146,23.241) 152.667,22.72 152.667,20.561 153.289,19.939 156.845,19.939 159.766,17.018 QE2.1@159.766,15.24
NetQE3_1: QE3.1 R3.2 | length 14.3
  Top Layer w0.254: R3.2@151.003,25.654 151.003,25.908 152.4,27.305 v1(152.527,27.305)
  Bottom Layer w0.254: v1(152.527,27.305) 152.4,27.178 152.4,25.28 153.296,24.384 156.972,24.384 159.766,21.59 QE3.1@159.766,20.574
NetQE4_1: QE4.1 R4.2 | length 14.6
  Top Layer w0.254: R4.2@151.003,29.464 151.003,31.369 v1(151.511,31.877)
  Bottom Layer w0.254: v1(151.511,31.877) 152.654,30.734 152.654,28.626 153.467,27.813 157.861,27.813 QE4.1@159.766,25.908
NetQE5_1: QE5.1 R5.2 | length 13.6
  Top Layer w0.254: R5.2@151.003,36.83 151.003,37.211 v1(152.019,38.227)
  Bottom Layer w0.254: v1(152.019,38.227) 152.667,37.579 152.667,35.674 155.702,32.639 158.369,32.639 QE5.1@159.766,31.242
NetQE6_1: QE6.1 R6.2 | length 12.8
  Top Layer w0.254: R6.2@151.003,40.894 151.003,41.275 v1(152.019,42.291)
  Bottom Layer w0.254: v1(152.019,42.291) 152.019,40.767 153.67,39.116 157.226,39.116 QE6.1@159.766,36.576
NetQE7_1: QE7.1 R7.2 | length 12.7
  Top Layer w0.254: R7.2@151.003,44.704 152.4,46.101 v1(152.4,46.355)
  Bottom Layer w0.254: v1(152.4,46.355) 152.4,44.171 153.518,43.053 158.623,43.053 QE7.1@159.766,41.91
NetQE8_1: QE8.1 R8.2 | length 13.2
  Top Layer w0.254: R8.2@151.003,48.514 151.003,50.165 v1(151.511,50.673)
  Bottom Layer w0.254: v1(151.511,50.673) 152.654,49.53 152.654,47.498 152.908,47.244 QE8.1@159.766,47.244
NetQE9_1: QE9.1 R9.2 | length 13
  Top Layer w0.254: R9.2@151.028,55.753 151.028,56.286 v1(152.019,57.277)
  Bottom Layer w0.254: v1(152.019,57.277) 152.019,54.991 154.432,52.578 QE9.1@159.766,52.578
NetQE10_1: QE10.1 R10.2 | length 12.2
  Top Layer w0.254: R10.2@151.028,59.563 152.021,60.556 152.021,60.958 v1(152.019,60.96)
  Bottom Layer w0.254: v1(152.019,60.96) 152.781,61.722 157.258,61.722 159.766,59.214 QE10.1@159.766,57.912
NetQE11_1: QE11.1 R11.2 | length 10.9
  Top Layer w0.254: R11.2@151.028,63.373 152.021,64.366 v1(152.021,64.493)
  Bottom Layer w0.254: v1(152.021,64.493) 153.187,65.659 157.607,65.659 159.766,63.5 QE11.1@159.766,63.246
NetQE12_1: QE12.1 R12.2 | length 12
  Top Layer w0.254: R12.2@151.028,67.183 151.028,69.112 v1(151.518,69.603)
  Bottom Layer w0.254: v1(151.518,69.603) 152.401,70.485 157.861,70.485 QE12.1@159.766,68.58
NetQE13_1: QE13.1 R13.2 | length 11.7
  Top Layer w0.254: R13.2@151.028,74.549 152.021,75.542 v1(152.021,75.923)
  Bottom Layer w0.254: v1(152.021,75.923) 152.679,76.581 158.369,76.581 159.766,75.184 QE13.1@159.766,73.914
NetQE14_1: QE14.1 R14.2 | length 10.8
  Top Layer w0.254: R14.2@151.028,78.359 151.663,78.359 151.917,78.613 151.917,79.629 v1(152.021,79.733)
  Bottom Layer w0.254: v1(152.021,79.733) 152.806,80.518 158.496,80.518 QE14.1@159.766,79.248
NetQE15_1: QE15.1 R15.2 | length 9.9
  Top Layer w0.254: R15.2@151.028,82.169 151.028,82.448 v1(152.273,83.693)
  Bottom Layer w0.254: v1(152.273,83.693) 152.908,84.328 159.512,84.328 QE15.1@159.766,84.582
NetQE16_1: QE16.1 R16.2 | length 11.1
  Top Layer w0.254: R16.2@151.028,85.979 151.028,87.274 v1(151.511,87.757)
  Bottom Layer w0.254: v1(151.511,87.757) 153.67,89.916 QE16.1@159.766,89.916
NetR35_2: R35.2 U4.1 | length 4.4
  Top Layer w0.254: v1(28.575,65.405) 28.575,65.276 U4.1@31.083,62.768
  Bottom Layer w0.254: R35.2@28.321,66.04 28.321,65.659 v1(28.575,65.405)
NetR36_2: R36.2 U4.21 | length 17.9
  Top Layer w0.254: U4.21@36.433,55.918 36.433,53.61 38.989,51.054 R36.2@38.989,39.116
NetR37_2: R37.2 U4.20 | length 17
  Top Layer w0.254: U4.20@35.933,55.918 35.941,55.91 35.941,53.34 36.449,52.832 R37.2@36.449,39.116
NetR40_1: R40.1 U4.38 | length 51.8
  Top Layer w0.254: U4.38@37.433,64.118 37.433,65.373 39.878,67.818 41.656,67.818 43.434,69.596 43.434,71.247 42.418,72.263 v1(40.64,72.263)
  Bottom Layer w0.254: R40.1@10.414,59.944 13.208,59.944 14.732,61.468 14.732,65.913 21.082,72.263 v1(40.64,72.263)
NetR41_1: R41.1 U4.39 | length 50
  Top Layer w0.254: U4.39@36.933,64.118 36.933,65.762 39.624,68.453 41.395,68.453 42.418,69.476 v1(42.418,70.993)
  Bottom Layer w0.254: R41.1@10.414,62.484 12.446,62.484 13.843,63.881 13.843,66.294 21.082,73.533 41.148,73.533 42.418,72.263 v1(42.418,70.993)
OUT_CH0: R1.1 TL1.16 | length 5.3
  Top Layer w0.254: R1.1@149.606,17.78 149.606,16.51 v1(150.114,16.002)
  Bottom Layer w0.254: TL1.16@149.665,19.137 149.665,16.451 v1(150.114,16.002)
OUT_CH1: R2.1 TL1.14 | length 5.7
  Top Layer w0.254: R2.1@149.606,21.59 150.876,20.32 v1(151.511,20.32)
  Bottom Layer w0.254: TL1.14@149.665,21.677 151.424,21.677 151.638,21.463 151.638,20.447 v1(151.511,20.32)
OUT_CH2: R3.1 TL1.12 | length 4.7
  Top Layer w0.254: R3.1@149.606,25.654 149.606,24.638 149.987,24.257 v1(151.384,24.257)
  Bottom Layer w0.254: TL1.12@149.665,24.217 149.705,24.257 v1(151.384,24.257)
OUT_CH3: R4.1 TL1.10 | length 5.9
  Top Layer w0.254: R4.1@149.606,29.464 149.606,28.829 150.368,28.067 v1(151.638,28.067)
  Bottom Layer w0.254: TL1.10@149.665,26.757 150.963,26.757 151.638,27.432 v1(151.638,28.067)
OUT_CH4: R5.1 TL4.16 | length 5
  Top Layer w0.254: R5.1@149.606,36.83 149.606,35.56 v1(149.987,35.179)
  Bottom Layer w0.254: TL4.16@149.665,38.187 149.665,35.501 v1(149.987,35.179)
OUT_CH5: R6.1 TL4.14 | length 5.4
  Top Layer w0.254: R6.1@149.606,40.894 151.13,39.37 v1(151.511,39.37)
  Bottom Layer w0.254: TL4.14@149.665,40.727 149.752,40.64 151.003,40.64 151.511,40.132 v1(151.511,39.37)
OUT_CH6: R7.1 TL4.12 | length 4.9
  Top Layer w0.254: R7.1@149.606,44.704 149.606,43.688 149.987,43.307 v1(151.511,43.307)
  Bottom Layer w0.254: TL4.12@149.665,43.267 151.344,43.267 151.384,43.307 v1(151.511,43.307)
OUT_CH7: R8.1 TL4.10 | length 5.8
  Top Layer w0.254: R8.1@149.606,48.514 149.606,47.752 150.241,47.117 151.13,47.117 151.257,46.99 v1(151.511,46.99)
  Bottom Layer w0.254: TL4.10@149.665,45.807 151.09,45.807 151.511,46.228 v1(151.511,46.99)
OUT_CH8: R9.1 TL2.16 | length 5.2
  Top Layer w0.254: R9.1@149.631,55.753 149.631,54.458 v1(150.114,53.975)
  Bottom Layer w0.254: TL2.16@149.665,56.983 149.665,54.424 v1(150.114,53.975)
OUT_CH9: R10.1 TL2.14 | length 5.3
  Top Layer w0.254: R10.1@149.631,59.563 150.901,58.293 v1(151.511,58.293)
  Bottom Layer w0.254: TL2.14@149.665,59.523 151.17,59.523 151.511,59.182 v1(151.511,58.293)
OUT_CH10: R11.1 TL2.12 | length 5
  Top Layer w0.254: R11.1@149.631,63.373 149.631,62.332 149.987,61.976 151.512,61.976 v1(151.518,61.983)
  Bottom Layer w0.254: TL2.12@149.665,62.063 149.745,61.983 v1(151.518,61.983)
OUT_CH11: R12.1 TL2.10 | length 5.7
  Top Layer w0.254: R12.1@149.631,67.183 149.631,66.269 149.987,65.913 v1(151.511,65.913)
  Bottom Layer w0.254: TL2.10@149.665,64.603 150.836,64.603 151.511,65.278 v1(151.511,65.913)
OUT_CH12: R13.1 TL5.16 | length 4.6
  Top Layer w0.254: R13.1@149.631,74.549 149.631,73.381 v1(149.987,73.025)
  Bottom Layer w0.254: TL5.16@149.665,75.779 149.665,73.347 v1(149.987,73.025)
OUT_CH13: R14.1 TL5.14 | length 5.7
  Top Layer w0.254: R14.1@149.631,78.359 149.733,78.359 150.876,77.216 v1(151.638,77.216) v1@151.765,77.089
  Bottom Layer w0.254: TL5.14@149.665,78.319 151.344,78.319 151.765,77.898 151.765,77.343 v1(151.638,77.216)
OUT_CH14: R15.1 TL5.12 | length 4.8
  Top Layer w0.254: R15.1@149.631,82.169 149.631,81.255 149.987,80.899 v1(151.511,80.899)
  Bottom Layer w0.254: TL5.12@149.665,80.859 149.705,80.899 v1(151.511,80.899)
OUT_CH15: R16.1 TL5.10 | length 5.8
  Top Layer w0.254: R16.1@149.631,85.979 149.631,85.192 150.114,84.709 v1(151.638,84.709)
  Bottom Layer w0.254: TL5.10@149.665,83.399 150.836,83.399 151.638,84.201 v1(151.638,84.709)
P24V: C5.1 P2.18 QE1.3 QE2.3 QE3.3 QE4.3 QE5.3 QE6.3 QE7.3 QE8.3 QE9.3 QE10.3 QE11.3 QE12.3 QE13.3 QE14.3 QE15.3 QE16.3 U2.1 | length 142.1
  Top Layer w1: C5.1@135.382,13.97 135.636,13.716 137.414,13.716 ; v2@140.462,13.716 v2(140.97,13.716) 137.414,13.716 ; U2.1@140.716,10.414 138.557,10.414 137.414,11.557 137.414,13.716 ; v2(165.989,5.207) 166.37,5.207 176.022,14.859 P2.18@176.022,18.034
  Bottom Layer w1: v2(140.97,13.716) 142.008,12.678 147.596,12.678 153.924,6.35 164.338,6.35 164.846,6.858 ; 164.846,7.112 164.846,6.858 ; QE16.3@164.846,89.916 QE15.3@164.846,84.582 QE14.3@164.846,79.248 QE13.3@164.846,73.914 QE12.3@164.846,68.58 QE11.3@164.846,63.246 QE10.3@164.846,57.912 QE9.3@164.846,52.578 QE8.3@164.846,47.244 QE7.3@164.846,41.91 QE6.3@164.846,36.576 QE5.3@164.846,31.242 QE4.3@164.846,25.908 QE3.3@164.846,20.574 QE2.3@164.846,15.24 QE1.3@164.846,9.906 164.846,6.858 ; v2(165.989,5.207) 165.735,5.207 164.846,6.096 164.846,6.858
PA8: P7.36 R48.1 | length 11.7
  Top Layer w0.254: P7.36@66.04,18.796 64.77,20.066 64.77,23.114 R48.1@69.624,27.968
PB12: P7.60
PB13: P7.59
PB14: P7.58
PB15: P7.57
PC6: P7.40 R46.1 | length 8.6
  Top Layer w0.254: P7.40@60.96,18.796 59.69,20.066 59.69,24.257 R46.1@61.531,26.098
PC7: P7.39 R47.1 | length 7.2
  Top Layer w0.254: P7.39@60.96,21.336 60.96,22.098 R47.1@65.532,26.67
PC13: P6.6
PG: C7.1 J1.13 J1.14 pad.0 R39.2 | length 599.7
  Top Layer w0.508: pad.0@5,95 14.224,85.776 J1.13@14.224,69.218 J1.14@14.224,53.718 ; pad.0@175,5 178.689,8.689 178.689,91.311 pad.0@175,95
  Top Layer w1: R39.2@162.56,5.334 163.322,4.572 163.322,2.235 C7.1@163.576,1.981 171.981,1.981 pad.0@175,5
  Bottom Layer w0.508: pad.0@175,5 171.611,1.611 93.389,1.611 pad.0@90,5 85.668,0.668 9.332,0.668 pad.0@5,5 1.905,8.095 1.905,91.905 pad.0@5,95 8.552,98.552 86.448,98.552 pad.0@90,95 93.806,98.806 171.194,98.806 pad.0@175,95
PG11: P7.18 R49.1 | length 10.8
  Top Layer w0.254: P7.18@88.9,18.796 87.63,20.066 87.63,25.527 R49.1@90.169,28.066
PG15: P7.12
RESET: P6.20
RS485_RE: P7.42 U5.2 U5.3 | length 67.6
  Top Layer w0.254: P7.42@58.42,18.796 57.15,20.066 57.15,24.765 v1(63.226,30.841) ; v1(96.139,60.706) 96.19,60.757 U5.3@102.071,60.757
  Top Layer w0.508: U5.3@102.071,60.757 U5.2@102.071,62.027
  Bottom Layer w0.254: v1(63.226,30.841) 81.153,48.768 83.566,48.768 95.504,60.706 v1(96.139,60.706)
SDCLK: C2.2 CON1.5 P7.31 R20.2 | length 70.9
  Top Layer w0.254: C2.2@29.177,34.384 C2.2@29.21,34.417 29.845,33.782 R20.2@31.623,33.782
  Top Layer w0.508: CON1.5@26.162,34.384 C2.2@29.177,34.384
  Bottom Layer w0.254: v1(30.734,33.782) 30.734,32.893 31.877,31.75 31.877,16.002 33.401,14.478 64.262,14.478 67.31,17.526 67.31,22.225 67.691,22.606 70.485,22.606 71.12,21.971 P7.31@71.12,21.336
SDCMD: CON1.2 P7.28 R21.2 | length 74.3
  Top Layer w0.254: CON1.2@26.162,26.884 26.71,26.884 v1(27.345,27.519) 28.771,28.946 28.771,30.295 29.718,31.242 R21.2@31.623,31.242
  Bottom Layer w0.254: v1(27.345,27.519) 28.027,26.837 28.027,14.01 30.607,11.43 69.088,11.43 76.2,18.542 P7.28@76.2,18.796
SDDATA0: CON1.7 P7.38 R19.2 | length 61.4
  Top Layer w0.254: CON1.7@26.162,39.384 27.164,39.384 29.464,37.084 30.861,37.084 R19.2@31.623,36.322 31.623,36.068 v1(30.988,35.433)
  Bottom Layer w0.254: v1(30.988,35.433) 32.512,33.909 32.512,16.637 34.163,14.986 61.087,14.986 63.5,17.399 P7.38@63.5,18.796
SDDATA1: CON1.8 P7.37 R18.2 | length 63.7
  Top Layer w0.254: CON1.8@26.162,41.009 27.825,41.009 29.972,38.862 R18.2@31.623,38.862 v1(30.734,37.973)
  Bottom Layer w0.254: v1(30.734,37.973) 33.274,35.433 33.274,17.018 34.544,15.748 59.69,15.748 62.23,18.288 62.23,20.066 P7.37@63.5,21.336
SDDATA2: CON1.9 P7.33 R23.2 | length 63.1
  Top Layer w0.254: CON1.9@26.162,21.884 27.599,21.884 R23.2@31.623,25.908 v1(31.039,25.324)
  Bottom Layer w0.254: v1(31.039,25.324) 31.115,25.247 31.115,15.367 32.639,13.843 66.04,13.843 69.85,17.653 69.85,20.066 P7.33@68.58,21.336
SDDATA3: CON1.1 P7.32 R22.2 | length 66.6
  Top Layer w0.254: CON1.1@26.162,24.384 27.813,24.384 29.718,26.289 29.718,27.559 v1@30.306,28.147 ; v1@30.494,28.053 v1(30.4,28.053) 30.794,28.448 R22.2@31.623,28.448
  Bottom Layer w0.254: v1(30.4,28.053) 30.045,27.699 30.045,15.12 31.83,13.335 67.945,13.335 71.374,16.764 71.374,18.542 P7.32@71.12,18.796
TPRX+: J1.1 R42.2 U4.3 | length 28.1
  Top Layer w0.254: J1.1@17.526,65.918 18.796,64.648 18.796,61.341 19.304,60.833 22.987,60.833 23.922,61.768 U4.3@31.083,61.768
  Bottom Layer w0.254: J1.1@17.526,65.918 19.299,67.691 25.019,67.691 25.527,67.183 R42.2@25.527,66.04
TPRX-: J1.2 R43.2 U4.4 | length 13.5
  Top Layer w0.254: J1.2@20.066,64.648 22.474,64.648 23.241,63.881 24.638,63.881 v1(25.527,62.992) ; v1(26.289,60.96) 26.43,60.96 26.738,61.268 U4.4@31.083,61.268
  Bottom Layer w0.254: v1(25.527,62.992) 25.545,62.992 25.56,62.977 25.56,62.263 25.56,61.592 26.192,60.96 v1(26.289,60.96)
TPTX+: J1.3 R44.2 U4.7 | length 25.2
  Top Layer w0.254: J1.3@17.526,63.378 15.875,61.727 15.875,60.198 16.51,59.563 18.161,59.563 19.431,58.293 21.591,58.293 22.098,58.8 v1(22.098,59.309) ; U4.7@31.083,59.768 32.463,59.768 v1(32.639,59.944)
  Bottom Layer w0.254: v1(22.098,59.309) 22.479,59.69 25.56,59.69 ; R44.2@25.527,58.674 25.56,58.707 25.56,59.69 ; v1(32.639,59.944) 32.512,59.944 32.086,59.518 25.732,59.518 25.56,59.69
TPTX-: J1.6 R45.2 U4.8 | length 22.3
  Top Layer w0.254: U4.8@31.083,59.268 32.299,59.268 32.639,58.928 v1(32.639,58.547)
  Bottom Layer w0.254: J1.6@20.066,59.568 22.098,57.536 22.098,54.61 23.114,53.594 24.638,53.594 25.527,54.483 R45.2@25.527,54.864 26.797,56.134 26.797,57.785 27.813,58.801 32.385,58.801 v1(32.639,58.547)
USART1_RX: P7.34
USART1_TX: P7.35
USART3_RX: P6.56 R32.1 U5.1 | length 103.5
  Top Layer w0.254: P6.56@40.64,78.796 40.64,77.343 41.783,76.2 53.975,76.2 69.85,60.325 94.234,60.325 95.504,61.595 97.358,61.595 v1(99.06,63.297) U5.1@102.071,63.297 ; v1(123.063,56.261) R32.1@125.984,56.261
  Bottom Layer w0.254: v1(99.06,63.297) 102.184,63.297 103.505,61.976 103.505,57.785 104.521,56.769 122.518,56.769 123.026,56.261 v1(123.063,56.261)
USART3_TX: P6.55 R31.1 U5.4 | length 102.8
  Top Layer w0.254: P6.55@40.64,81.336 40.061,81.336 39.37,80.645 39.37,76.835 41.021,75.184 53.467,75.184 69.164,59.487 U5.4@102.071,59.487 102.071,58.33 v1(102.362,58.039) ; v1(123.19,53.34) 123.444,53.34 123.475,53.371 R31.1@125.974,53.369
  Bottom Layer w0.254: v1(102.362,58.039) 102.362,57.277 103.632,56.007 119.38,56.007 122.047,53.34 v1(123.19,53.34)
VCC5V: C1.1 C4.2 C6.1 C10.2 CT1.1 D4.1 D5.1 L1.2 P4.13 P4.15 P6.59 P6.60 P9.4 R29.2 TL1.1 TL1.3 TL1.5 TL1.7 TL2.1 TL2.3 TL2.5 TL2.7 TL4.1 TL4.3 TL4.5 TL4.7 TL5.1 TL5.3 TL5.5 TL5.7 U1.3 U2.4 U6.3 | length 510.6
  Top Layer w0.254: R29.2@109.855,2.54 U6.3@109.855,5.97
  Top Layer w0.508: 93.472,50.8 C1.1@97.028,50.8 102.16,50.8 U1.3@102.211,50.851
  Top Layer w1: v2(24.257,82.042) 34.854,82.042 P6.59@35.56,81.336 ; v2@88.201,56.134 88.201,56.07 93.472,50.8 93.472,48.26 95.123,46.609 101.219,46.609 115.189,32.639 115.189,18.923 116.573,17.539 123.584,17.539 v2(124.121,17.001) CT1.1@125.882,15.24 125.882,15.171 125.918,15.136 125.946,15.136 CT1.1@125.966,15.156 ; v1(94.107,65.151) 92.837,65.151 92.71,65.278 D5.1@92.71,65.532 92.71,68.961 93.091,69.342 v1(94.107,69.342) ; U6.3@109.855,5.97 U6.3@110.488,6.603 111.504,5.588 C10.2@120.904,5.588 C6.1@123.952,5.588 C4.2@127,5.588 ; v2(127.508,7.366) 127.508,6.096 C4.2@127,5.588 ; L1.2@130.683,3.048 128.143,5.588 C4.2@127,5.588 ; L1.2@132.842,3.175 132.905,3.111 134.938,3.111 137.14,5.314 U2.4@140.716,5.314
  Bottom Layer w0.254: P6.59@35.56,81.336 35.56,83.82 38.989,87.249 45.212,87.249 47.752,89.789 47.752,92.456 ; P4.15@46.482,93.726 47.752,92.456 ; P4.13@49.022,93.726 47.752,92.456
  Bottom Layer w0.508: 129.166,15.136 134.684,15.136 135.169,15.621 144.145,15.621 145.923,17.399 145.923,18.502 145.434,18.991 145.434,19.137 ; TL1.1@144.077,19.137 145.434,19.137 ; TL1.3@144.077,21.677 145.434,21.677 ; TL1.5@144.077,24.217 145.434,24.217 ; TL1.7@144.077,26.757 145.517,26.757 ; TL4.1@144.077,38.187 145.387,38.187 145.923,37.651 145.923,27.163 145.517,26.757 ; TL4.7@144.077,45.807 145.517,45.807 ; TL2.1@144.077,56.983 145.434,56.983 ; TL2.3@144.077,59.523 145.434,59.523 ; TL2.5@144.077,62.063 145.434,62.063 ; TL2.7@144.077,64.603 145.517,64.603 ; TL5.1@144.077,75.779 145.434,75.779 ; TL5.3@144.077,78.319 145.434,78.319 ; TL5.5@144.077,80.859 145.434,80.859 ; TL5.7@144.077,83.399 145.517,83.399 145.858,83.058 145.858,81.283 145.434,80.859 ; 145.434,38.187 145.858,38.611 145.858,40.386 145.517,40.727 TL4.3@144.077,40.727 145.434,40.727 145.858,41.151 145.858,42.926 145.517,43.267 TL4.5@144.077,43.267 145.434,43.267 145.858,43.691 145.858,45.466 145.517,45.807 ; 145.434,19.137 145.858,19.561 145.858,21.336 145.517,21.677 145.434,21.677 ; 145.434,21.677 145.858,22.101 145.858,23.876 145.517,24.217 145.434,24.217 ; 145.434,24.217 145.858,24.641 145.858,26.416 145.517,26.757 ; 145.434,56.983 145.858,57.407 145.858,59.182 145.517,59.523 145.434,59.523 ; 145.434,56.983 145.923,56.494 145.923,46.213 145.517,45.807 ; 145.434,59.523 145.858,59.947 145.858,61.722 145.517,62.063 145.434,62.063 ; 145.434,62.063 145.858,62.487 145.858,64.262 145.517,64.603 ; 145.434,75.779 145.858,76.203 145.858,77.978 145.517,78.319 145.434,78.319 ; 145.434,75.779 145.923,75.29 145.923,65.009 145.517,64.603 ; 145.434,78.319 145.858,78.743 145.858,80.518 145.517,80.859 145.434,80.859
  Bottom Layer w1: v2(24.257,82.042) 13.843,82.042 4.318,72.517 4.318,28.067 30.734,1.651 74.041,1.651 75.819,3.429 75.819,4.318 82.931,11.43 93.853,11.43 96.139,9.144 106.172,9.144 114.173,17.145 123.977,17.145 v2(124.121,17.001) 127.216,17.001 127.513,16.704 127.513,16.746 129.123,15.136 129.166,15.136 129.166,6.724 128.537,6.096 128.27,6.096 127.508,6.858 v2(127.508,7.366) ; P6.60@35.56,78.796 P6.59@35.56,81.336 ; v2(88.138,56.134) 92.71,60.706 92.71,65.278 ; v1(94.107,65.151) 92.837,65.151 92.71,65.278 ; v1(94.107,69.342) 93.853,69.342 92.71,68.199 92.71,65.278
VDD25V: C9.2 CT2.1 J1.4 J1.5 U4.2 | length 30.4
  Top Layer w0.254: J1.4@20.066,62.108 20.226,62.268 U4.2@31.083,62.268
  Bottom Layer w0.254: J1.5@17.526,60.838 18.796,62.108 J1.4@20.066,62.108 21.976,60.198 28.448,60.198 28.956,60.706 CT2.1@28.956,62.23 33.655,62.23 C9.2@33.782,62.103
VDD33V: C3.2 C11.2 C12.1 CON1.4 FB1.2 J1.9 J1.12 LED41.1 LED42.1 P4.21 P4.23 R18.1 R19.1 R20.1 R21.1 R22.1 R23.1 R24.1 R25.1 R28.2 R34.2 R36.1 R37.1 U5.8 U6.2 U6.4 | length 485.1
  Top Layer w0.254: CON1.4@26.162,31.884 28.201,31.884 28.702,32.385 33.02,32.385 ; v2(111.379,53.848) 112.979,53.848 R28.2@116.275,57.143 121.151,57.143 122.682,58.674 LED42.1@125.755,58.674 ; v2(120.396,52.07) 121.158,52.07 122.428,50.8 LED41.1@125.857,50.8
  Top Layer w0.508: J1.12@6.276,54.868 5.203,54.868 3.429,56.642 3.429,66.675 4.822,68.068 J1.9@6.276,68.068 ; v2(27.686,85.852) 28.956,87.122 v2(32.385,87.122) v2@32.512,87.122 ; 33.02,24.003 R23.1@33.02,25.908 R22.1@33.02,28.448 R21.1@33.02,31.242 33.02,32.385 R20.1@33.02,33.782 R19.1@33.02,36.322 R18.1@33.02,38.862 R25.1@33.02,41.402 R24.1@33.02,43.942 ; R37.1@36.449,37.719 37.211,36.957 v2@37.592,36.957 ; 37.338,24.003 37.592,24.257 v2(37.592,36.703) v2@37.592,36.957 ; R36.1@38.989,37.719 38.227,36.957 v2@37.592,36.957 ; FB1.2@42.416,51.054 v1(43.942,51.054) ; U5.8@107.428,63.297 108.636,63.297 108.839,63.5 v1(108.839,64.262) ; v2(108.912,46.282) 111.252,48.622 v2(111.252,49.403)
  Top Layer w1: v2(27.94,11.684) 28.194,11.43 32.766,11.43 ; FB1.2@42.416,51.054 42.416,27.938 38.481,24.003 37.338,24.003 33.02,24.003 32.766,23.749 32.766,11.43 ; v2(92.837,44.958) 100.076,44.958 113.284,31.75 113.284,17.526 109.855,14.097 100.711,14.097 95.885,9.271 ; U6.4@116.584,9.143 U6.2@110.488,9.143 107.949,9.143 106.426,7.62 106.426,5.588 C12.1@104.14,3.302 100.584,3.302 C11.2@98.552,5.334 97.028,5.334 95.885,6.477 95.885,9.271 ; 32.766,11.43 93.726,11.43 95.885,9.271
  Bottom Layer w0.254: v2@111.76,53.848 115.57,53.848 117.348,52.07 v2(120.396,52.07)
  Bottom Layer w0.508: 6.276,41.783 6.373,41.88 ; J1.9@6.276,68.068 15.297,77.089 25.56,77.089 27.686,79.215 v2(27.686,85.852) ; v2(32.385,87.122) 32.385,91.44 34.671,93.726 P4.23@36.322,93.726 P4.21@38.862,93.726 ; R34.2@39.751,67.056 39.878,67.056 40.64,66.294 40.64,57.658 43.942,54.356 v1(43.942,51.054) ; v1(108.839,64.262) 108.839,63.5 108.204,62.865 105.41,62.865 C3.2@104.648,62.103 101.6,65.151 98.552,65.151 97.536,64.135 97.536,57.658 v2(108.912,46.282) ; v2(111.252,49.403) v2@111.252,53.848
  Bottom Layer w1: J1.12@6.276,54.868 6.276,41.783 6.276,29.538 24.13,11.684 v2(27.94,11.684) ; v2(92.837,44.958) 107.588,44.958 v2(108.912,46.282)